# Altium PCB esp-node.PcbDoc
Units mm, origin at the board's own origin, x right, y up, seen from the top; angles counter-clockwise.
Board outline 25.05 x 25.4 mm, 2 copper layers (Top Layer, Bottom Layer); 13 components, 15 nets, 98 pads, 73 vias.
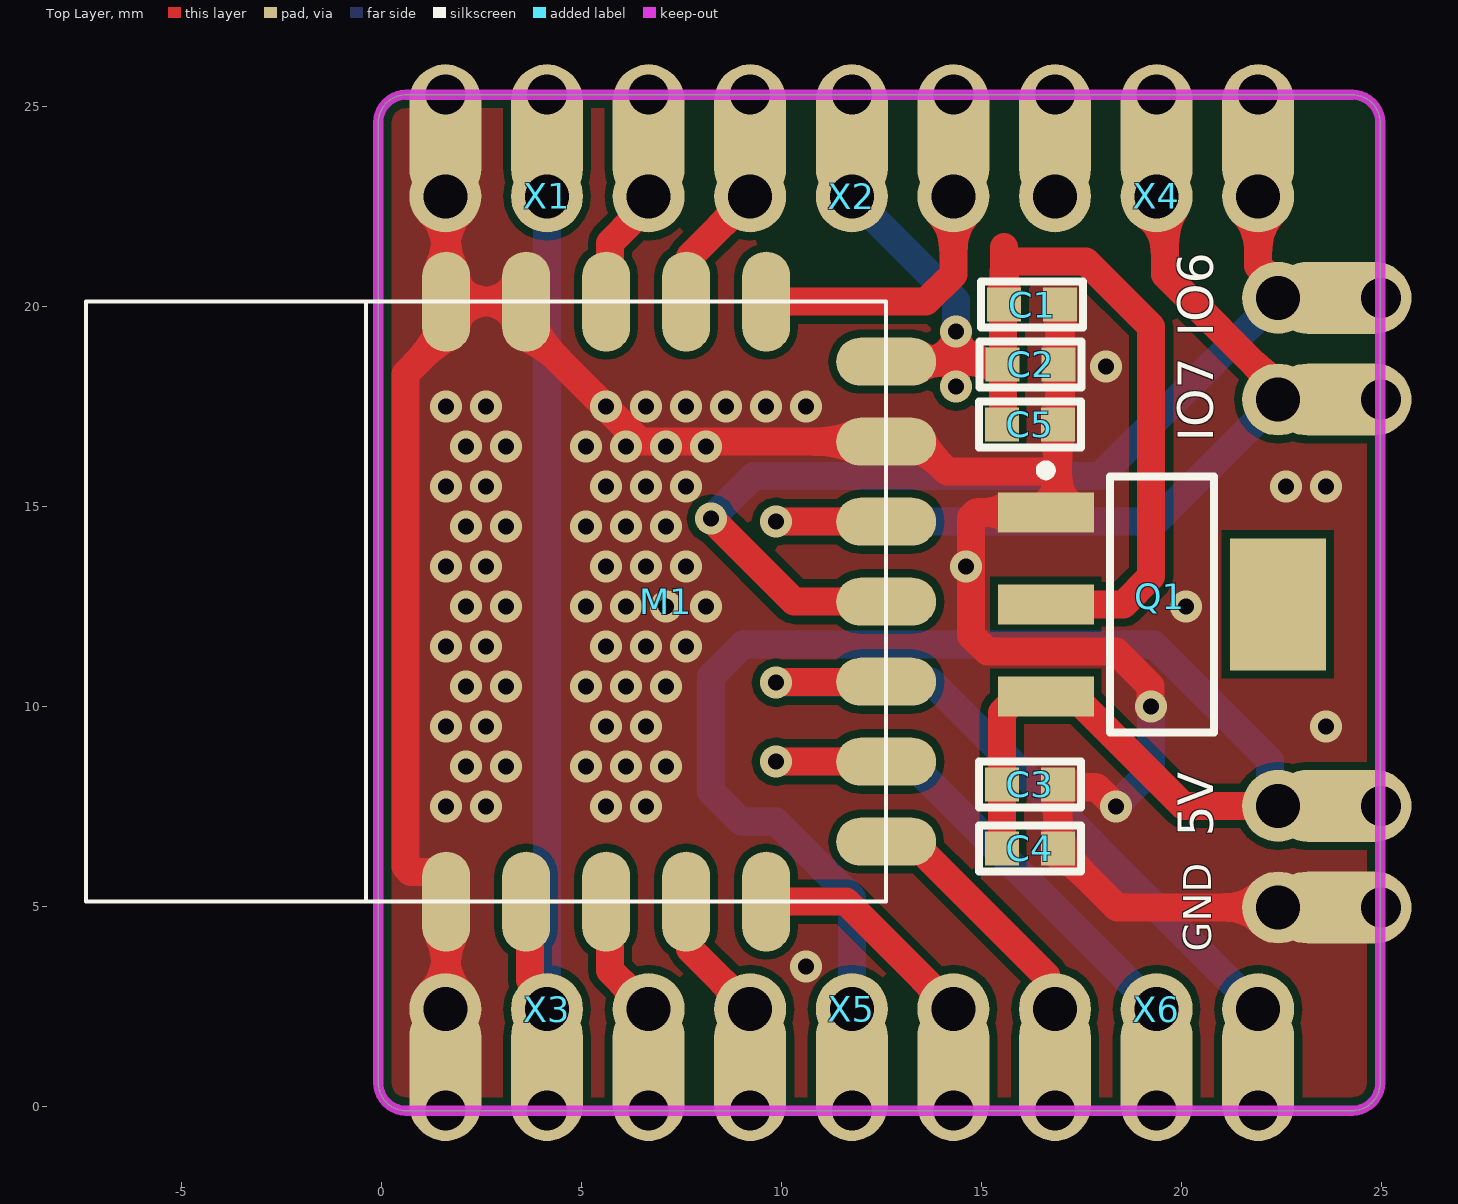
[diagram p0: Top Layer view]
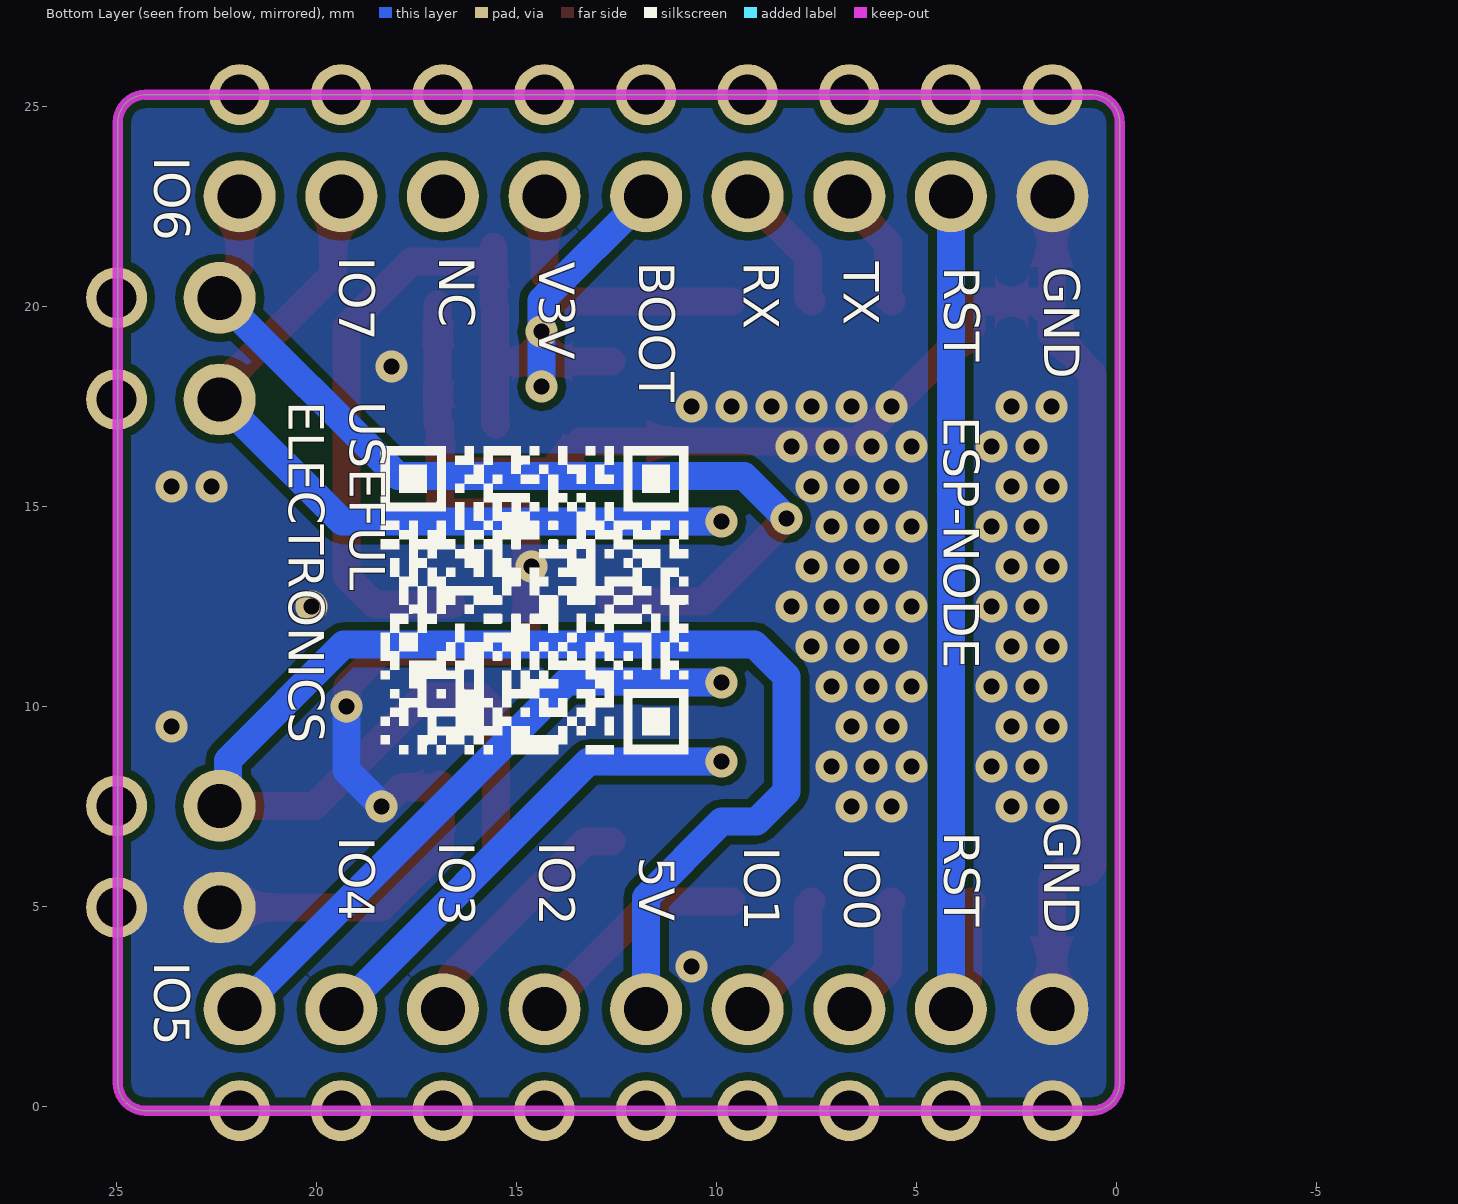
[diagram p1: Bottom Layer view, seen from below]
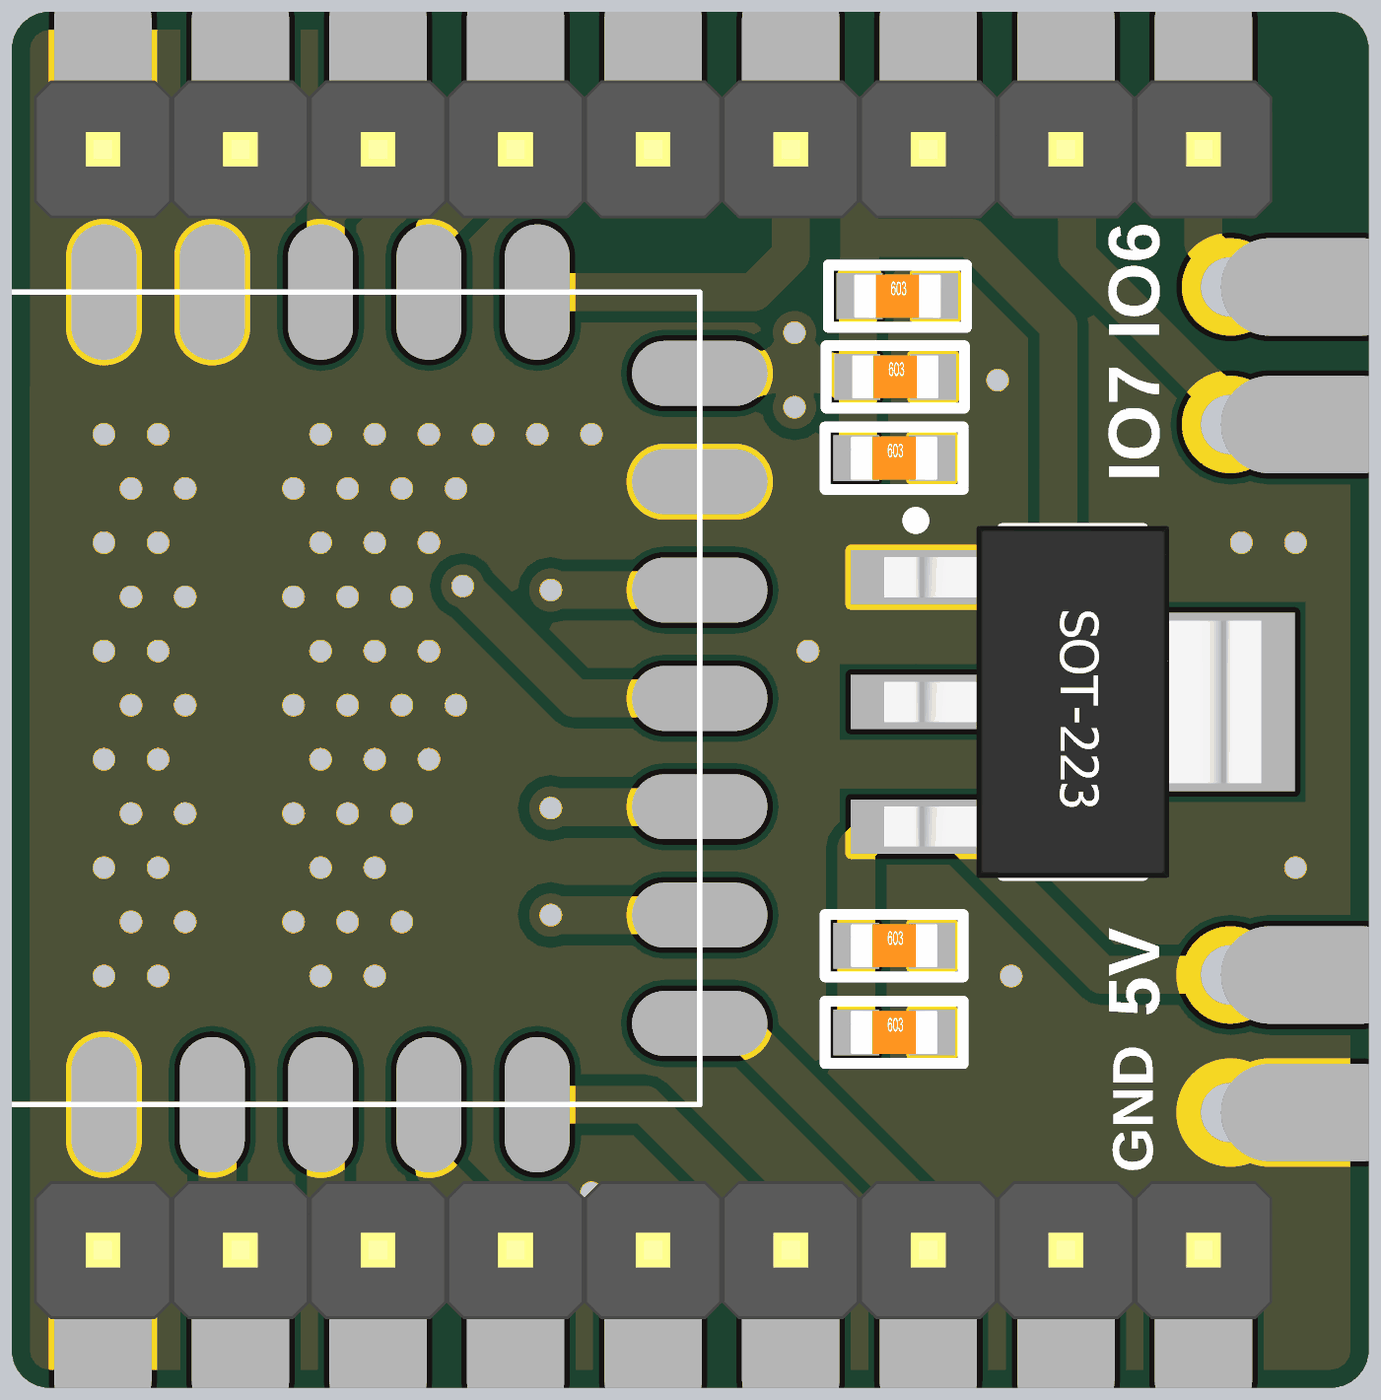
[diagram p2: 3D render of the assembled board from above, using the file's embedded part models]

## Layer stack, top to bottom
Top Solder: solder mask 0.0102, Solder Resist, Dk 3.5
Top Layer: signal copper 0.0356
Dielectric 1: dielectric 0.32, FR-4, Dk 4.8
Bottom Layer: signal copper 0.0356
Bottom Solder: solder mask 0.0102, Solder Resist, Dk 3.5

## Board outline
-0.075,0.6 -0.075,24.6 cw(c0.625,24.6) 0.625,25.3 24.275,25.3 cw(c24.275,24.6) 24.975,24.6 24.975,0.6 cw(c24.275,0.6) 24.275,-0.1 0.625,-0.1 cw(c0.625,0.6)

## Design rules (kind name [scope] priority, off if disabled: settings)
Clearance [All] p1: gap=0.2 ignorepadtopadclearanceinfootprint=FALSE except(0: Arc-Hole Track-Hole SMDPad-Hole THPad-Hole Via-Hole Fill-Hole Poly-Hole Region-Hole Text-Hole)
PolygonConnect [All] p1: connectstyle=Direct reliefconductorwidth=0.254 reliefentries=4 polygonreliefangle="90 Angle" airgapwidth=0.254
RoutingVias [All] p1: holewidth=0.4 width=1 viastyle="Through Hole" minholewidth=0.2 minwidth=0.5 maxholewidth=1 maxwidth=2
SolderMaskExpansion [All] p1: expansion=0.102 istentingtop=FALSE
Width [All] p1: maxlimit=2 minlimit=0.2 preferedwidth=0.7
30 further rules are at their usual default settings.

## Classes and differential pairs
net class 5V: 5V
net class 3V3: 3V3
net class GND: GND

## Components (designator, comment, footprint, x,y, rotation, side; value= is the part's Value field where it differs from the comment)
C1 "CL10B104KC8NNNC" "CAP: 0603" 16.275,20.05 r0 top value=0.1μF
C2 "CL10B475KQ8NQNC" "CAP: 0603" 16.235,18.56 r0 top value=4.7μF
C3 "CL10B475KQ8NQNC" "CAP: 0603" 16.215,8.06 r0 top value=4.7μF
C4 "CL10B104KC8NNNC" "CAP: 0603" 16.215,6.46 r0 top value=0.1μF
C5 "CL10B104KC8NNNC" "CAP: 0603" 16.215,17.06 r0 top value=0.1μF
M1 "ESP32-C2-05" ESP32-C2-05 12.625,5.125 r90 top
Q1 "AMS1117-3.3V" SOT223 19.515,12.56 r0 top
X1 "PMbus" "CON: PLS-3"#1 4.145,22.76 r0 top
X2 "PMbus" "CON: PLS-3"#1 11.765,22.76 r0 top
X3 "PMbus" "CON: PLS-3"#1 4.145,2.44 r0 top
X4 "PMbus" "CON: PLS-3"#2 19.385,22.76 r0 top
X5 "PMbus" "CON: PLS-3"#1 11.765,2.44 r0 top
X6 "PMbus" "CON: PLS-3"#1 19.385,2.44 r0 top

## Footprints (in the part's own frame and the unit in brackets; to place one, negate y for a bottom-side part, rotate by r counter-clockwise, add the part's x,y. Pads: shape width x height; smd on the part's side, far side on the other; paste and mask are expansions set on the pad)
"CAP: 0603" [mm]
  rect 0.85x0.85 smd mask+0.05: 1(-0.7,0) 2(0.7,0)
  silkscreen extent -1.28,-0.58 1.28,0.58, body extent -0.8,-0.4 0.8,0.4, height 0.3
"CON: PLS-3"#1 [mm]
  round 1.8 hole 1.1: 1(-2.54,0) 2(0,0) 3(2.54,0)
  body extent -3.81,-1.27 3.81,1.27, height 8.54
"CON: PLS-3"#2 [mm]
  round 1.8 hole 1.1: 2(-2.54,0) 2(0,0) 3(2.54,0)
  body extent -3.81,-1.27 3.81,1.27, height 8.54
ESP32-C2-05 [mm]
  oval 2.5x1.2 smd: 1(0,11) 2(0,9) 3(0,7) 4(0,5) 5(0,3) 13(15,3) 14(15,5) 15(15,7) 16(15,9) 17(15,11)
  oval 1.2x2.5 smd: 6(1.5,0) 7(3.5,0) 8(5.5,0) 9(7.5,0) 10(9.5,0) 11(11.5,0) 12(13.5,0)
  silkscreen extent 0,0 15,20, body extent 0,0 15,20, height 3
SOT223 [mm] "SOT223, 4-Leads, Body 6,50x7,00mm (avg), Pitch 2,30mm, IPC Medium Density"
  rect 2.4x1 smd: 1(-2.9,2.3) 2(-2.9,0) 3(-2.9,-2.3)
  rect 2.4x3.3 smd: 4(2.9,0)
  round 0.5 on Mech1: ""(-3,2.7)
  silkscreen extent -3.02,-3.2 1.3,3.47, body extent -3.48,-3.25 3.48,3.25, height 1.65

## Part data
C1 C4 C5: "0.1uF, 100V, 0603, X7R, ±10%, -55...+125°C", Manufacturer=Samsung, Package=0603, Component Type=Capacitors, HelpURL=https://www.mouser.com/ProductDetail/Samsung-Electro-Mechanics/CL10B104KC8NNNC?qs=%2FukktrhNKsY5bKXvqblW4Q%3D%3D, Manufacturer Part Number=CL10B104KC8NNNC, PartNumber=CL10B104KC8NNNC
C2 C3: "4.7uF, 6.3V, 0603, X7R, ±20%, -55...+85°C", Manufacturer=Samsung, Package=0603, HelpURL=https://eu.mouser.com/ProductDetail/Samsung-Electro-Mechanics/CL10B475KQ8NQNC?qs=6tbHoouHnQxd6rcaSwpT7Q%3D%3D, Manufacturer Part Number=CL10B475KQ8NQNC, PartNumber=CL10B475KQ8NQNC
X1 X2 X3 X4 X5 X6: library part PLS-3, "3 pins, pitch 2.54 mm, 500VAC, 2A/pin, -40...+85°C", Manufacturer=Connfly, Component Type=Connectors, HelpURL=https://www.chipdip.ru/product/pls-3, Manufacturer Part Number=PLS-3, PartNumber=PLS-3, Pitch=2.54mm

## Free pads (board coordinates)
  oval 1.8x3.5 smd: 2(1.605,24.3) 2(1.605,0.9) 2(4.145,24.3) 2(4.145,0.9) 2(6.685,24.3) 2(6.685,0.9) 2(9.225,0.9) 2(9.225,24.3) 2(11.765,0.9) 2(11.765,24.3) 2(14.305,0.9) 2(14.305,24.3) 2(16.845,24.3) 2(16.845,0.9) 2(19.385,24.3) 2(19.385,0.9) 2(21.925,24.3) 2(21.925,0.9)
  round 1.524 hole 1: 2(16.845,25.3) 3(1.605,25.3) 3(1.605,-0.1) 3(4.145,25.3) 3(4.145,-0.1) 3(6.685,25.3) 3(6.685,-0.1) 3(9.225,-0.1) 3(9.225,25.3) 3(11.765,-0.1) 3(11.765,25.3) 3(14.305,-0.1) 3(14.305,25.3) 3(16.845,-0.1) 3(19.385,25.3) 3(19.385,-0.1) 3(21.925,25.3) 3(21.925,-0.1) 3(25,4.98) 3(25,7.52) 3(25,17.68) 3(25,20.22)
  oval 3.5x1.8 smd: 2(24,4.98) 2(24,7.52) 2(24,17.68) 2(24,20.22)
  round 1.8 hole 1.1: 4(22.425,4.98) 4(22.425,7.52) 4(22.425,17.68) 4(22.425,20.22)

## Via types
v1: diameter 0.8, hole 0.4, Top Layer to Bottom Layer, tented both sides, 73 vias

## Nets (pads, with @x,y where several pads share a name; then routed paths per layer and width w, separated by ;. In a path a pad name is that pad's centre, name@x,y a point inside that pad or via, vN(x,y) a via of type N, cw(c..) or ccw(c..) an arc to the next point about the centre after c; other vN are vias at no path point)
3V3: C1.1 C2.1 C5.1 M1.12 pad.2@11.765,24.3 pad.3@11.765,25.3 Q1.2 X2.2 | length 28.1
  Top Layer w0.7: M1.12 14.375,18.625 ; v1(14.375,18) 14.375,18.625 ; v1(14.375,19.375) 14.375,18.625 ; C5.1 15.545,17.09 C1.1@15.545,20.02 ; C2.1 15.47,18.625 14.375,18.625 ; C1.1 15.575,21.125 ; 15.575,21.49 15.575,21.125 ; Q1.2 18.56,12.56 19.25,13.25 19.25,19.5 17.625,21.125 15.575,21.125
  Bottom Layer w0.7: X2.2 14.375,20.15 v1(14.375,19.375) v1(14.375,18)
5V: C3.1 C4.1 pad.2@11.765,0.9 pad.2@24,7.52 pad.3@11.765,-0.1 pad.3@25,7.52 pad.4@22.425,7.52 Q1.3 X5.2 | length 38.6
  Top Layer w0.7: C4.1 C3.1 15.515,9.86 15.915,10.26 Q1.3 17.315,10.26 20.055,7.52 pad.2@22.425,7.52
  Bottom Layer w0.7: X5.2 11.765,5.235 9.875,7.125 9,7.125 8.25,7.875 8.25,10.75 9.05,11.55 19.325,11.55 22.215,8.66 22.215,7.73 pad.4@22.425,7.52
GND: C1.2 C2.2 C3.2 C4.2 C5.2 M1.1 M1.11 M1.16 M1.17 pad.2@1.605,0.9 pad.2@1.605,24.3 pad.2@24,4.98 pad.3@1.605,25.3 pad.3@1.605,-0.1 pad.3@25,4.98 pad.4@22.425,4.98 Q1.1 X1.1 X3.1 | length 67
  Top Layer w0.7: X3.1 1.615,2.45 1.615,5.65 1.394,5.871 0.731,5.871 0.602,6 0.602,18.317 1.625,19.34 1.625,19.75 1.813,19.938 1.813,20.082 1.856,20.125 M1.16 3.625,19.475 6.475,16.625 13.41,16.625 14.16,15.875 16.85,15.875 16.915,15.94 ; X1.1 1.615,22.75 1.615,20.135 M1.17 ; C5.2 16.915,15.94 ; C5.2@16.975,17.06 C1.2 ; v1(18.375,7.5) 17.89,7.985 16.99,7.985 C3.2 C4.2 18.395,4.98 pad.2@22.425,4.98 ; v1(19.25,10) 19.231,10.019 19.231,10.519 18.375,11.375 15.16,11.375 14.75,11.785 14.75,14.735 14.875,14.86 Q1.1 16.765,14.86 16.915,15.01 16.915,15.94
  Bottom Layer w0.7: v1(18.375,7.5) 18.375,7.527 19.25,8.402 v1(19.25,10)
  other v1: 10.625,3.5 1.625,7.5 2.625,7.5 5.625,7.5 6.625,7.5 2.125,8.5 3.125,8.5 5.125,8.5 6.125,8.5 7.125,8.5 1.625,9.5 2.625,9.5 5.625,9.5 6.625,9.5 23.625,9.5 2.125,10.5 3.125,10.5 5.125,10.5 6.125,10.5 7.125,10.5 1.625,11.5 2.625,11.5 5.625,11.5 6.625,11.5 7.625,11.5 2.125,12.5 3.125,12.5 5.125,12.5 6.125,12.5 7.125,12.5 8.125,12.5 20.125,12.5 1.625,13.5 2.625,13.5 5.625,13.5 6.625,13.5 7.625,13.5 14.625,13.5 2.125,14.5 3.125,14.5 5.125,14.5 6.125,14.5 7.125,14.5 1.625,15.5 2.625,15.5 5.625,15.5 6.625,15.5 7.625,15.5 22.625,15.5 23.625,15.5 2.125,16.5 3.125,16.5 5.125,16.5 6.125,16.5 7.125,16.5 8.125,16.5 1.625,17.5 2.625,17.5 5.625,17.5 6.625,17.5 7.625,17.5 8.625,17.5 9.625,17.5 10.625,17.5 18.125,18.5
IO0: M1.3 pad.2@6.685,0.9 pad.3@6.685,-0.1 X3.3 | length 3.1
  Top Layer w0.7: M1.3 5.721,5.029 5.721,3.404 X3.3
IO1: M1.4 pad.2@9.225,0.9 pad.3@9.225,-0.1 X5.1 | length 3.3
  Top Layer w0.7: M1.4 7.721,5.029 7.721,3.944 X5.1
IO2: M1.5 pad.2@14.305,0.9 pad.3@14.305,-0.1 X5.3 | length 5.8
  Top Layer w0.7: M1.5 11.62,5.125 X5.3
IO3: M1.6 pad.2@16.845,0.9 pad.3@16.845,-0.1 X6.1 | length 6.3
  Top Layer w0.7: M1.6 13.275,6.625 16.635,3.265 16.635,2.65 X6.1
IO4: M1.7 pad.2@19.385,0.9 pad.3@19.385,-0.1 X6.2 | length 14.8
  Top Layer w0.7: v1(9.875,8.625) M1.7
  Bottom Layer w0.7: v1(9.875,8.625) 13.2,8.625 X6.2
IO5: M1.8 pad.2@21.925,0.9 pad.3@21.925,-0.1 X6.3 | length 18.2
  Top Layer w0.7: v1(9.875,10.6) 9.888,10.613 12.612,10.613 M1.8
  Bottom Layer w0.7: v1(9.875,10.6) 11.809,10.6 11.834,10.625 13.74,10.625 X6.3
IO6: M1.9 pad.2@21.925,24.3 pad.2@24,20.22 pad.3@21.925,25.3 pad.3@25,20.22 pad.4@22.425,20.22 X4.3 | length 24.4
  Top Layer w0.7: v1(8.25,14.7) 10.325,12.625 M1.9 ; X4.3 21.925,21.018 22.425,20.518 pad.2@22.425,20.22
  Bottom Layer w0.7: v1(8.25,14.7) 9.314,15.764 17.969,15.764 pad.4@22.425,20.22
IO7: M1.10 pad.2@19.385,24.3 pad.2@24,17.68 pad.3@19.385,25.3 pad.3@25,17.68 pad.4@22.425,17.68 X4.2@19.385,22.76 | length 22.9
  Top Layer w0.7: v1(9.875,14.625) M1.10 ; pad.2@19.385,22.76 19.593,22.552 19.593,20.805 22.425,17.973 pad.2@22.425,17.68
  Bottom Layer w0.7: v1@9.856,14.606 v1(9.875,14.625) 19.37,14.625 pad.4@22.425,17.68
IO9-BOOT: M1.13 pad.2@14.305,24.3 pad.3@14.305,25.3 X2.3 | length 6.9
  Top Layer w0.7: M1.13 13.625,20.125 14.305,20.805 X2.3
RESET: M1.2 pad.2@4.145,0.9 pad.2@4.145,24.3 pad.3@4.145,25.3 pad.3@4.145,-0.1 X1.2 X3.2 | length 23.2
  Top Layer w0.7: M1.2 3.721,5.029 3.721,3.162 4.145,2.738 X3.2
  Bottom Layer w0.7: X3.2 X1.2
RX: M1.14 pad.2@9.225,24.3 pad.3@9.225,25.3 X2.1 | length 3.3
  Top Layer w0.7: M1.14 7.721,20.221 7.721,21.255 X2.1
TX: M1.15 pad.2@6.685,24.3 pad.3@6.685,25.3 X1.3 | length 3.1
  Top Layer w0.7: M1.15 5.721,20.221 5.721,21.596 6.685,22.56 X1.3
pads on no net: Q1. Q1.4 X4.2@16.845,22.76

## Polygon pours and split planes (outlines as drawn)
GND on Top Layer "Top Layer-GND" (solid, remove dead copper, pour order 0): -0.075,0.6 -0.075,24.6 cw(c0.625,24.6) 0.625,25.3 24.275,25.3 cw(c24.275,24.6) 24.975,24.6 24.975,0.6 cw(c24.275,0.6) 24.275,-0.1 0.625,-0.1 cw(c0.625,0.6)
GND on Bottom Layer "Bottom Layer-GND" (solid, remove dead copper, pour order 1): -0.075,0.6 -0.075,24.6 cw(c0.625,24.6) 0.625,25.3 24.275,25.3 cw(c24.275,24.6) 24.975,24.6 24.975,0.6 cw(c24.275,0.6) 24.275,-0.1 0.625,-0.1 cw(c0.625,0.6)

## Keep-outs
Keep-Out Layer:
  lines w0.254: 24.255,-0.1 23.705,-0.1 0.625,-0.1 cw(c0.625,0.6) -0.075,0.6 -0.075,24.6 cw(c0.625,24.6) 0.625,25.3 24.275,25.3 cw(c24.275,24.6) 24.975,24.6 24.975,0.6 cw(c24.275,0.6) 24.275,-0.1

## Silkscreen, mask and mechanical layers (free items; w line width, h text height)
Top Overlay:
  text "IO6" at 21.107,19.25 h1.52 r90
  text "IO7" at 21.107,16.625 h1.52 r90
  text "5V" at 21.107,6.75 h1.52 r90
  text "GND" at 20.986,3.875 h1.2 r90
Bottom Overlay:
  drawing of 87 lines, arcs and shapes, not listed
  text "IO6" at 24.357,23.75 h1.52 r90
  text "NC" at 17.233,21.25 h1.52 r90
  text "IO7" at 19.732,21.25 h1.52 r90
  text "TX" at 7.125,21.125 h1.52 r90
  text "RX" at 9.625,21.125 h1.52 r90
  text "BOOT" at 12.232,21.125 h1.52 r90
  text "V3V" at 14.732,21.125 h1.52 r90
  text "GND" at 2.107,21 h1.52 r90
  text "RST" at 4.607,21 h1.52 r90
  text "USEFUL  / ELECTRONICS" at 21,17.639 h1.52 r90
  text "ESP-NODE" at 4.625,17.264 h1.52 r90
  text "GND" at 2.107,7.125 h1.52 r90
  text "RST" at 4.607,6.875 h1.52 r90
  text "IO4" at 19.732,6.75 h1.52 r90
  text "IO2" at 14.732,6.625 h1.52 r90
  text "IO3" at 17.232,6.625 h1.52 r90
  text "IO0" at 7.107,6.5 h1.52 r90
  text "IO1" at 9.607,6.5 h1.52 r90
  text "5V" at 12.232,6.25 h1.52 r90
  text "IO5" at 24.357,3.625 h1.52 r90